# Altium PCB ESP PCB.PcbDoc
Units mm, origin at the board's own origin, x right, y up, seen from the top; angles counter-clockwise.
Board outline 35.6 x 30 mm, 2 copper layers (Top Layer, Bottom Layer); 16 components, 15 nets, 49 pads, 0 vias.
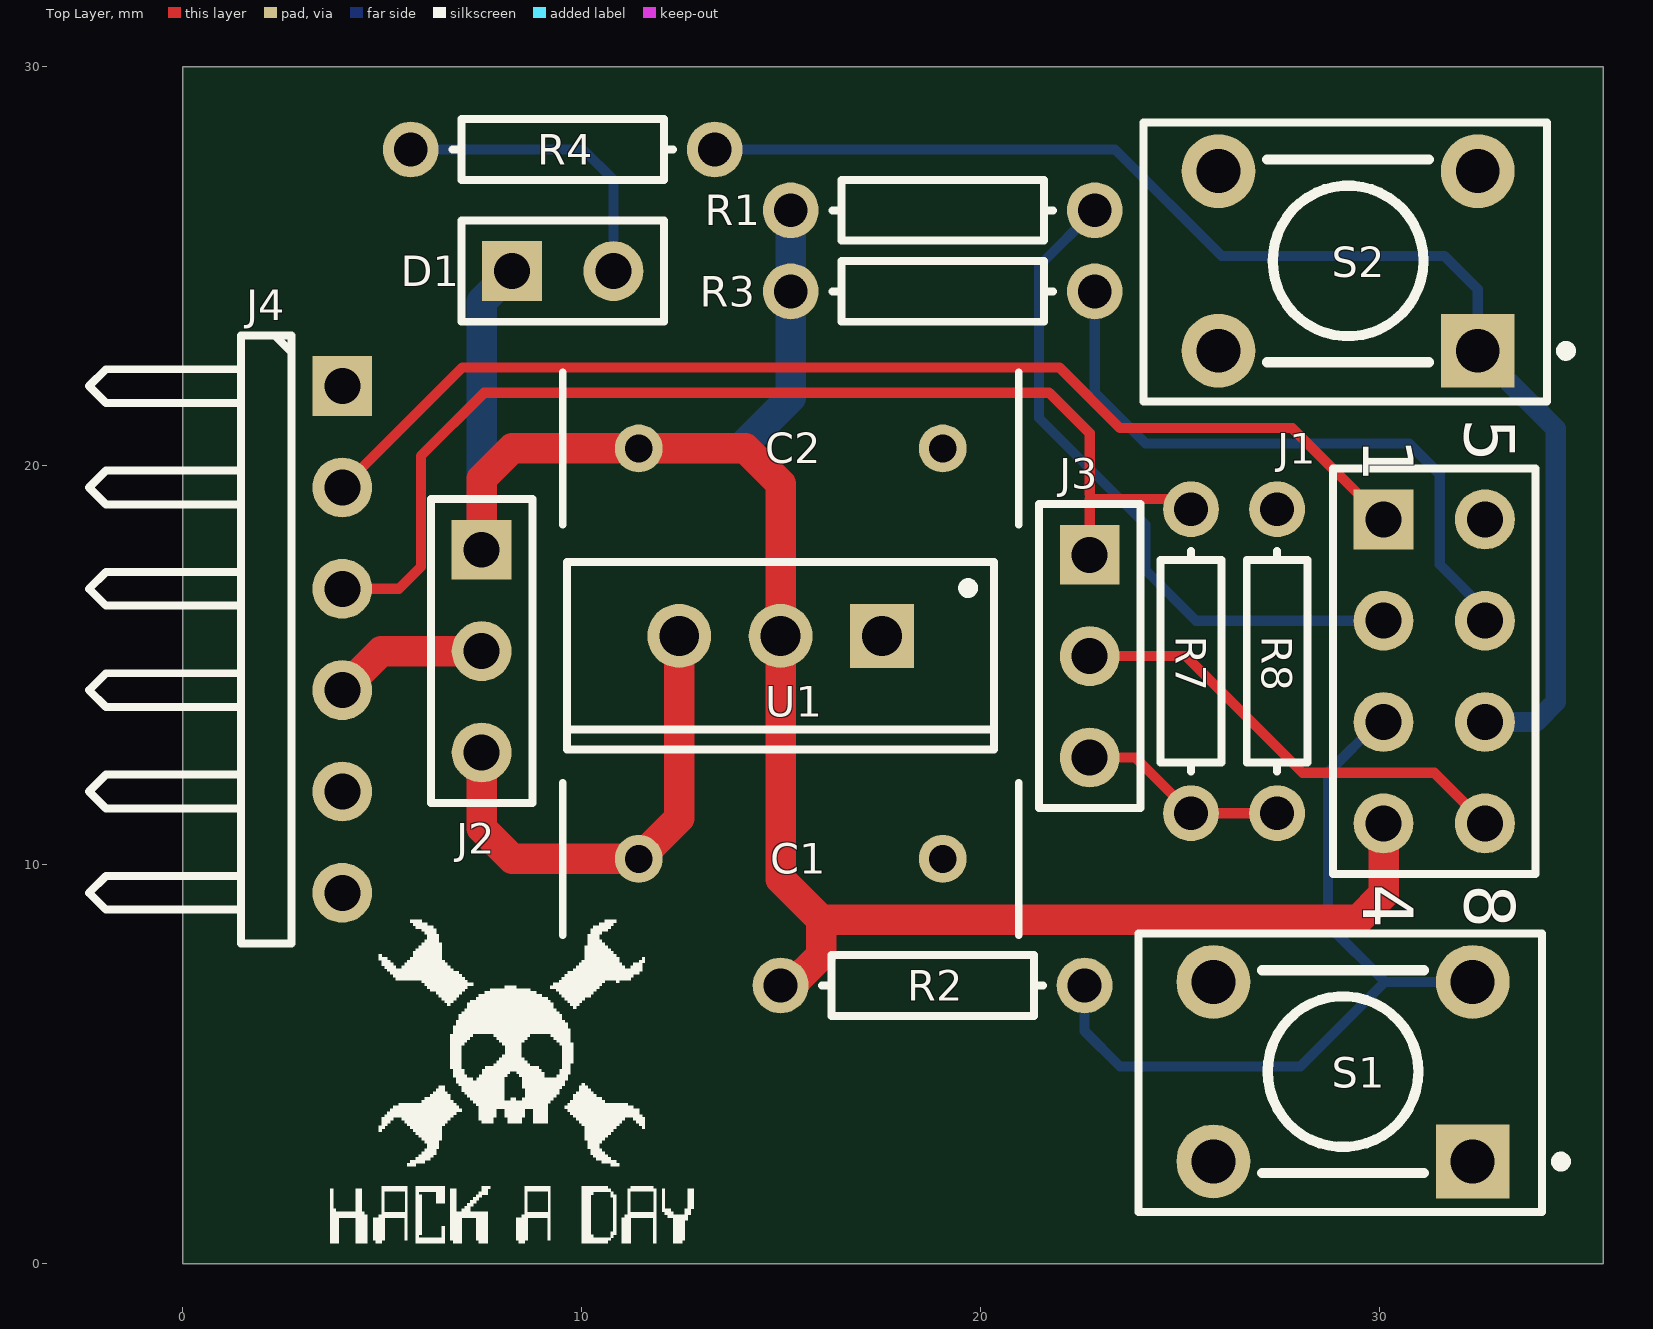
[diagram p0: Top Layer view]
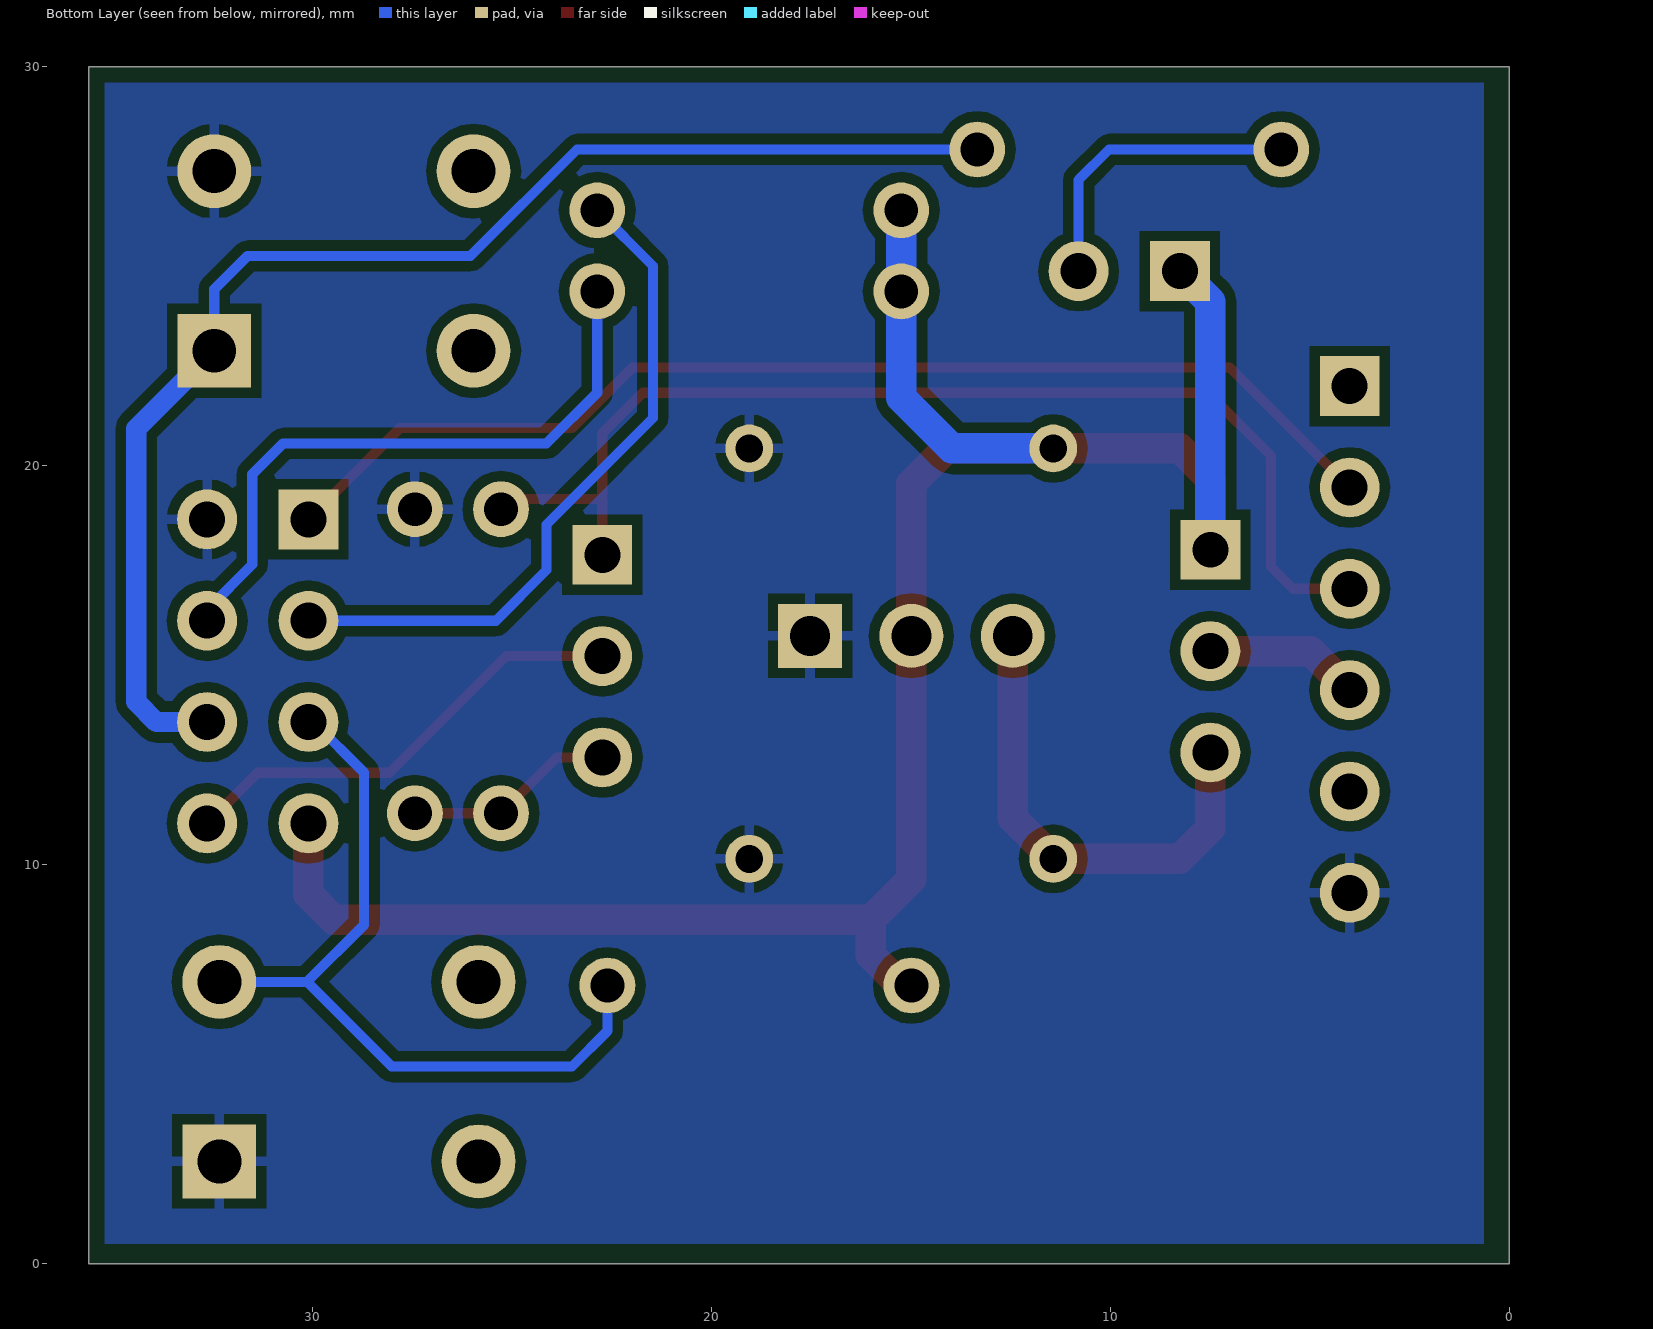
[diagram p1: Bottom Layer view, seen from below]

## Layer stack, top to bottom
Top Layer: signal copper 0.0356
Dielectric: dielectric 0.32, FR-4, Dk 4.8
Bottom Layer: signal copper 0.0356

## Board outline
0,0 0,30 35.6,30 35.6,0

## Design rules (kind name [scope] priority, off if disabled: settings)
Clearance [All] p1: gap=0.254
PolygonConnect [All] p1: connectstyle=Relief reliefconductorwidth=0.254 reliefentries=4 polygonreliefangle="90 Angle" airgapwidth=0.254
RoutingVias [All] p1: holewidth=0.711 width=1.27 viastyle="Through Hole" minholewidth=0.711 minwidth=1.27 maxholewidth=0.711 maxwidth=1.27
SilkToSilkClearance [All] p1 off: silktosilkclearance=0.254
SolderMaskExpansion [All] p1: expansion=0.102
Width [All] p1: maxlimit=0.762 minlimit=0.254 preferedwidth=0.254 minimp=50.000000 maximp=50.000000 favimp=50.000000
27 further rules are at their usual default settings.

## Classes and differential pairs
component class "ESP Programming_Top": D1 J1 J3 R1 R2 R3 R4 R7 R8 S1 S2
component class Regulator: C1 C2 U1
component class USB-SER1: J2 J4

## Components (designator, comment, footprint, x,y, rotation, side; value= is the part's Value field where it differs from the comment)
C1 "Cap" RAD-0.3 15.24,10.152 r180 top
C2 "Cap" RAD-0.3 15.24,20.439 r180 top
D1 "LED2" HDR1X2 8.255,24.884 r0 top
J1 "Header 4X2A" HDR2X4_CEN 30.099,18.661 r270 top
J2 "3-WAY JUMPER" HDR1X3 7.493,17.899 r270 top
J3 "3-WAY JUMPER" HDR1X3 22.733,17.772 r270 top
J4 "Header 6H" HDR1X6H 4,22 r270 top
R1 "Res1" AXIAL-0.3 19.05,26.408 r180 top
R2 "Res1" AXIAL-0.3 18.796,6.977 r180 top
R3 "Res1" AXIAL-0.3 19.05,24.376 r180 top
R4 "Res1" AXIAL-0.3 9.525,27.932 r180 top
R7 "Res1" AXIAL-0.3 25.273,15.105 r90 top
R8 "Res1" AXIAL-0.3 27.432,15.105 r270 top
S1 "SW-PB" NOPB-4 29.083,4.818 r180 top
S2 "SW-PB" NOPB-4 29.21,25.138 r180 top
U1 "LM1117T-3.3" T03B 14.986,15.74 r180 top

## Footprints (in the part's own frame and the unit in brackets; to place one, negate y for a bottom-side part, rotate by r counter-clockwise, add the part's x,y. Pads: shape width x height; smd on the part's side, far side on the other; paste and mask are expansions set on the pad)
AXIAL-0.3 [mm] "Axial Device, Thru-Hole; 2 Leads; 0.3 in Pin Spacing"
  round 1.4 hole 0.85: 1(-3.81,0) 2(3.81,0)
  silkscreen extent -2.77,-0.76 2.77,0.76
HDR1X2 [mm] "Connector; Header; 2 Position"
  rect 1.5x1.5 hole 0.9: 1(0,0)
  round 1.5 hole 0.9: 2(2.54,0)
  silkscreen extent -1.27,-1.27 3.81,1.27
HDR1X3 [mm] "Connector; Header; 3 Position"
  rect 1.5x1.5 hole 0.9: 1(0,0)
  round 1.5 hole 0.9: 2(2.54,0) 3(5.08,0)
  silkscreen extent -1.27,-1.27 6.35,1.27, body extent -1.17,-1.25 6.45,1.25, height 8.22
HDR1X6H [mm] "Connector; Header; 6 Position; Right Angle"
  rect 1.5x1.5 hole 0.9: 1(0,0)
  round 1.5 hole 0.9: 2(2.54,0) 3(5.08,0) 4(7.62,0) 5(10.16,0) 6(12.7,0)
  silkscreen extent -1.27,-6.35 13.97,-1.27
HDR2X4_CEN [mm] "Connector; Header; 4x2 Position"
  rect 1.5x1.5 hole 0.9: 1(0,0)
  round 1.5 hole 0.9: 2(2.54,0) 3(5.08,0) 4(7.62,0) 5(0,2.54) 6(2.54,2.54) 7(5.08,2.54) 8(7.62,2.54)
  silkscreen extent -1.27,-1.27 8.89,3.81
NOPB-4 [mm] "Switch; 4 Leads"
  rect 1.85x1.85 hole 1.1: 1(-3.25,2.25)
  round 1.85 hole 1.1: 2(-3.25,-2.25) 3(3.25,-2.25) 4(3.25,2.25)
  silkscreen extent -5.59,-3.46 5.13,3.52
RAD-0.3 [mm] "Radial Cap, Thru-Hole; 2 Leads; 0.3 in Pin Spacing"
  round 1.2 hole 0.7: 1(-3.81,0) 2(3.81,0)
  silkscreen extent -5.71,-1.91 5.71,1.91
T03B [mm] "TO, Thru-Hole, Vertical, Heatsink Mounted; 3 In-Line Leads; Pitch 2.54 mm"
  rect 1.6x1.6 hole 1: 1(-2.54,0)
  round 1.6 hole 1: 2(0,0) 3(2.54,0)
  silkscreen extent -5.35,-1.85 5.35,2.85, body extent -5.4,-1.9 5.4,2.9, height 19.8

## Part data
C1 C2: "Capacitor"
D1: "Typical RED, GREEN, YELLOW, AMBER GaAs LED"
J1: "Header, 4-Pin, Dual row"
J2 J3: "3-Way Jumper - Center Output"
J4: "Header, 6-Pin, Right Angle"
R1 R2 R3 R4 R7 R8: "Resistor"
S1 S2: "Switch"
U1: library part CMP-0062-02490-2, "800mA Low-Dropout Linear Regulator, 3-pin TO-220"

## Nets (pads, with @x,y where several pads share a name; then routed paths per layer and width w, separated by ;. In a path a pad name is that pad's centre, name@x,y a point inside that pad or via, vN(x,y) a via of type N, cw(c..) or ccw(c..) an arc to the next point about the centre after c; other vN are vias at no path point)
3V3: C2.2 D1.1 J1.4 J2.1 R1.2 R2.2 R3.2 U1.2 | length 56
  Top Layer w0.762: J2.1 7.493,19.677 8.255,20.439 11.303,20.439 C2.2@11.43,20.566 ; C2.2 14.097,20.439 14.986,19.55 U1.2 14.986,9.644 16.002,8.628 ; R2.2 15.24,6.977 16.002,7.739 16.002,8.628 ; J1.4 30.099,9.263 29.464,8.628 16.002,8.628
  Bottom Layer w0.762: J2.1 7.493,24.122 D1.1 ; C2.2 13.97,20.439 15.24,21.709 R3.2 R1.2
5V0: C1.2 J2.3 U1.3 | length 12.2
  Top Layer w0.762: J2.3 7.493,10.914 8.255,10.152 C1.2 12.446,11.168 U1.3
CH_PD-A: J1.2 R1.1 | length 17.2
  Bottom Layer w0.254: R1.1 21.463,25.011 21.463,21.201 24.13,18.534 24.13,17.391 25.4,16.121 J1.2
CTS-A: J4.5
DTR-A: J4.1
GND: C1.1 C2.1 J1.5 J4.6 R8.1 S1.1 S2.2 U1.1
GPIO0-A: J1.7 R4.1 S2.1 | length 33.7
  Bottom Layer w0.254: R4.1 23.368,27.932 26.035,25.265 31.623,25.265 32.46,24.428 S2.1
  Bottom Layer w0.508: S2.1 34.417,20.931 34.417,14.089 33.909,13.581 J1.7
GPIO2-A: J1.6 R3.1 | length 16.2
  Bottom Layer w0.254: R3.1 22.86,21.836 24.13,20.566 30.734,20.566 31.508,19.792 31.508,17.53 32.639,16.399 J1.6
NetD1_2: D1.2 R4.2 | length 7.7
  Bottom Layer w0.254: R4.2 10.033,27.932 10.795,27.17 D1.2
RST-A: J1.3 R2.1 S1.2 | length 19.9
  Bottom Layer w0.254: R2.1 22.606,5.834 23.495,4.945 28.012,4.945 30.135,7.068 ; J1.3 29.972,13.581 28.702,12.311 28.702,8.501 30.135,7.068 ; S1.2 30.135,7.068
RX_PC-A: J1.1 J4.2 | length 28.9
  Top Layer w0.254: J4.2 7.011,22.471 21.971,22.471 23.495,20.947 27.813,20.947 J1.1
TX-PC: J1.8 J3.2 | length 11.6
  Top Layer w0.254: J3.2 25.146,15.232 28.067,12.311 31.369,12.311 J1.8
TX_PC-A: J3.1 J4.3 R7.2 | length 28.4
  Top Layer w0.254: J4.3 5.42,16.92 5.969,17.469 5.969,20.251 7.554,21.836 21.717,21.836 22.733,20.82 22.733,19.296 ; J3.1 22.733,19.169 25.019,19.169 R7.2
TX_PC-A-DIV: J3.3 R7.1 R8.2 | length 5.3
  Top Layer w0.254: J3.3 23.876,12.692 R7.1 26.352,11.295 R8.2
VIN: J2.2 J4.4 | length 3.9
  Top Layer w0.762: J4.4 4.979,15.359 J2.2
pads on no net: S1.3 S1.4 S2.3 S2.4

## Polygon pours and split planes (outlines as drawn)
GND on Bottom Layer "Top Layer-No Net" (solid, pour order 2): 0.635,29.6 35.2,29.6 35.2,0.5 0.635,0.5 0.635,29.6

## Silkscreen, mask and mechanical layers (free items; w line width, h text height)
Top Overlay:
  drawing of 13 lines, arcs and shapes, not listed
Mechanical 1:
  the board outline again, w0.254

## Dimensions
35.6,0 to 35.6,30 on Mechanical 13
0,0 to 35.6,0 on Mechanical 13

## Text inside footprints (layer, text, board x,y; h text height)
J1: Top Overlay "5" at 32.131,21.201 h1.27 r270; Top Overlay "1" at 29.591,20.693 h1.27 r270; Top Overlay "4" at 29.591,9.517 h1.27 r270; Top Overlay "8" at 32.131,9.517 h1.27 r270